# Altium PCB Lab11.PcbDoc
Units mil, origin at the board's own origin, x right, y up, seen from the top; angles counter-clockwise.
Board outline 6200 x 5500 mil, 2 copper layers (Top Layer, Top, Bottom Layer, Bottom); 21 components, 15 nets, 48 pads, 0 vias.
Unrouted connection lines stored in the file: 2.
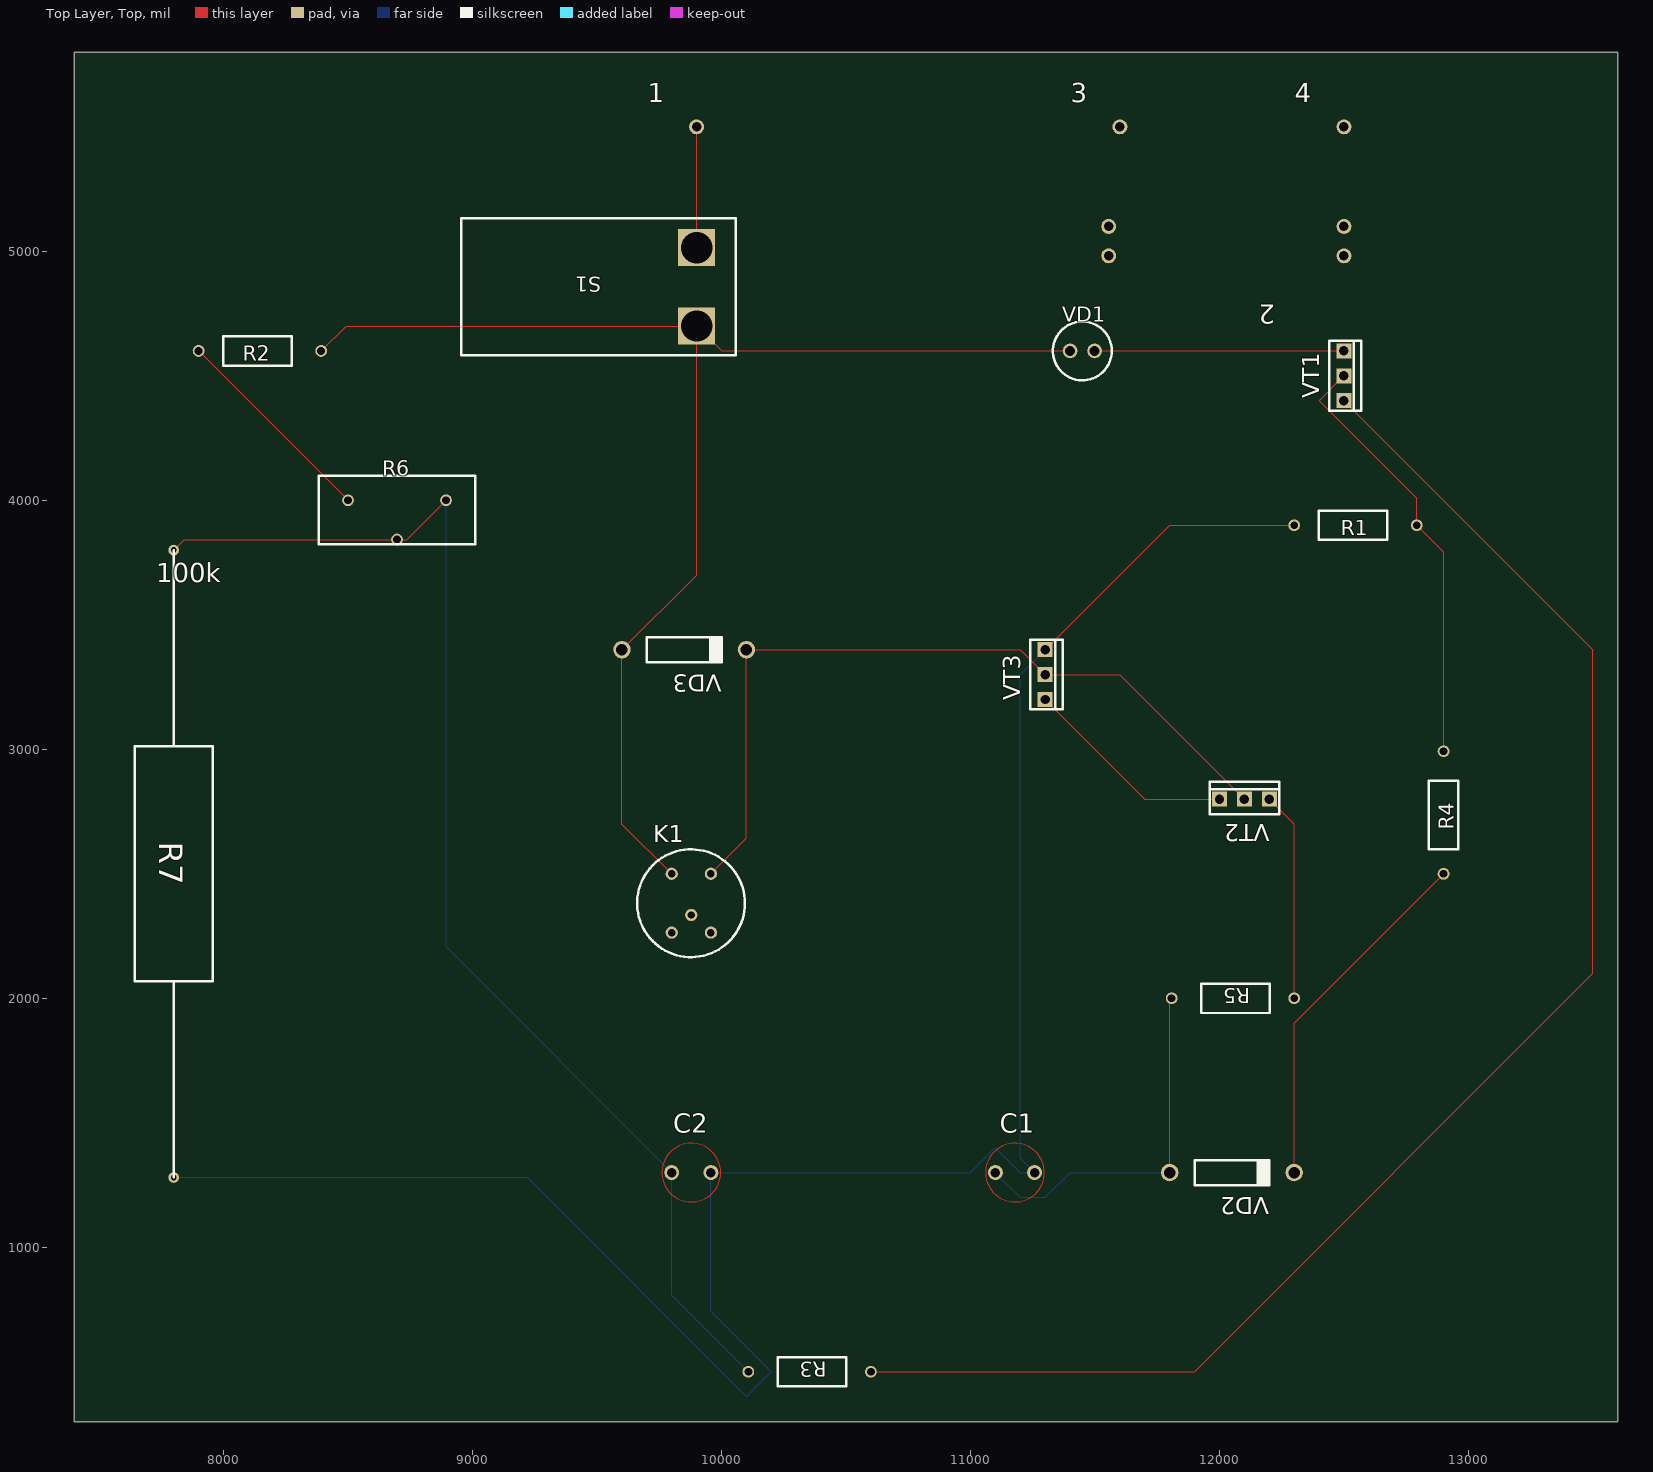
[diagram p0: Top Layer, Top view]
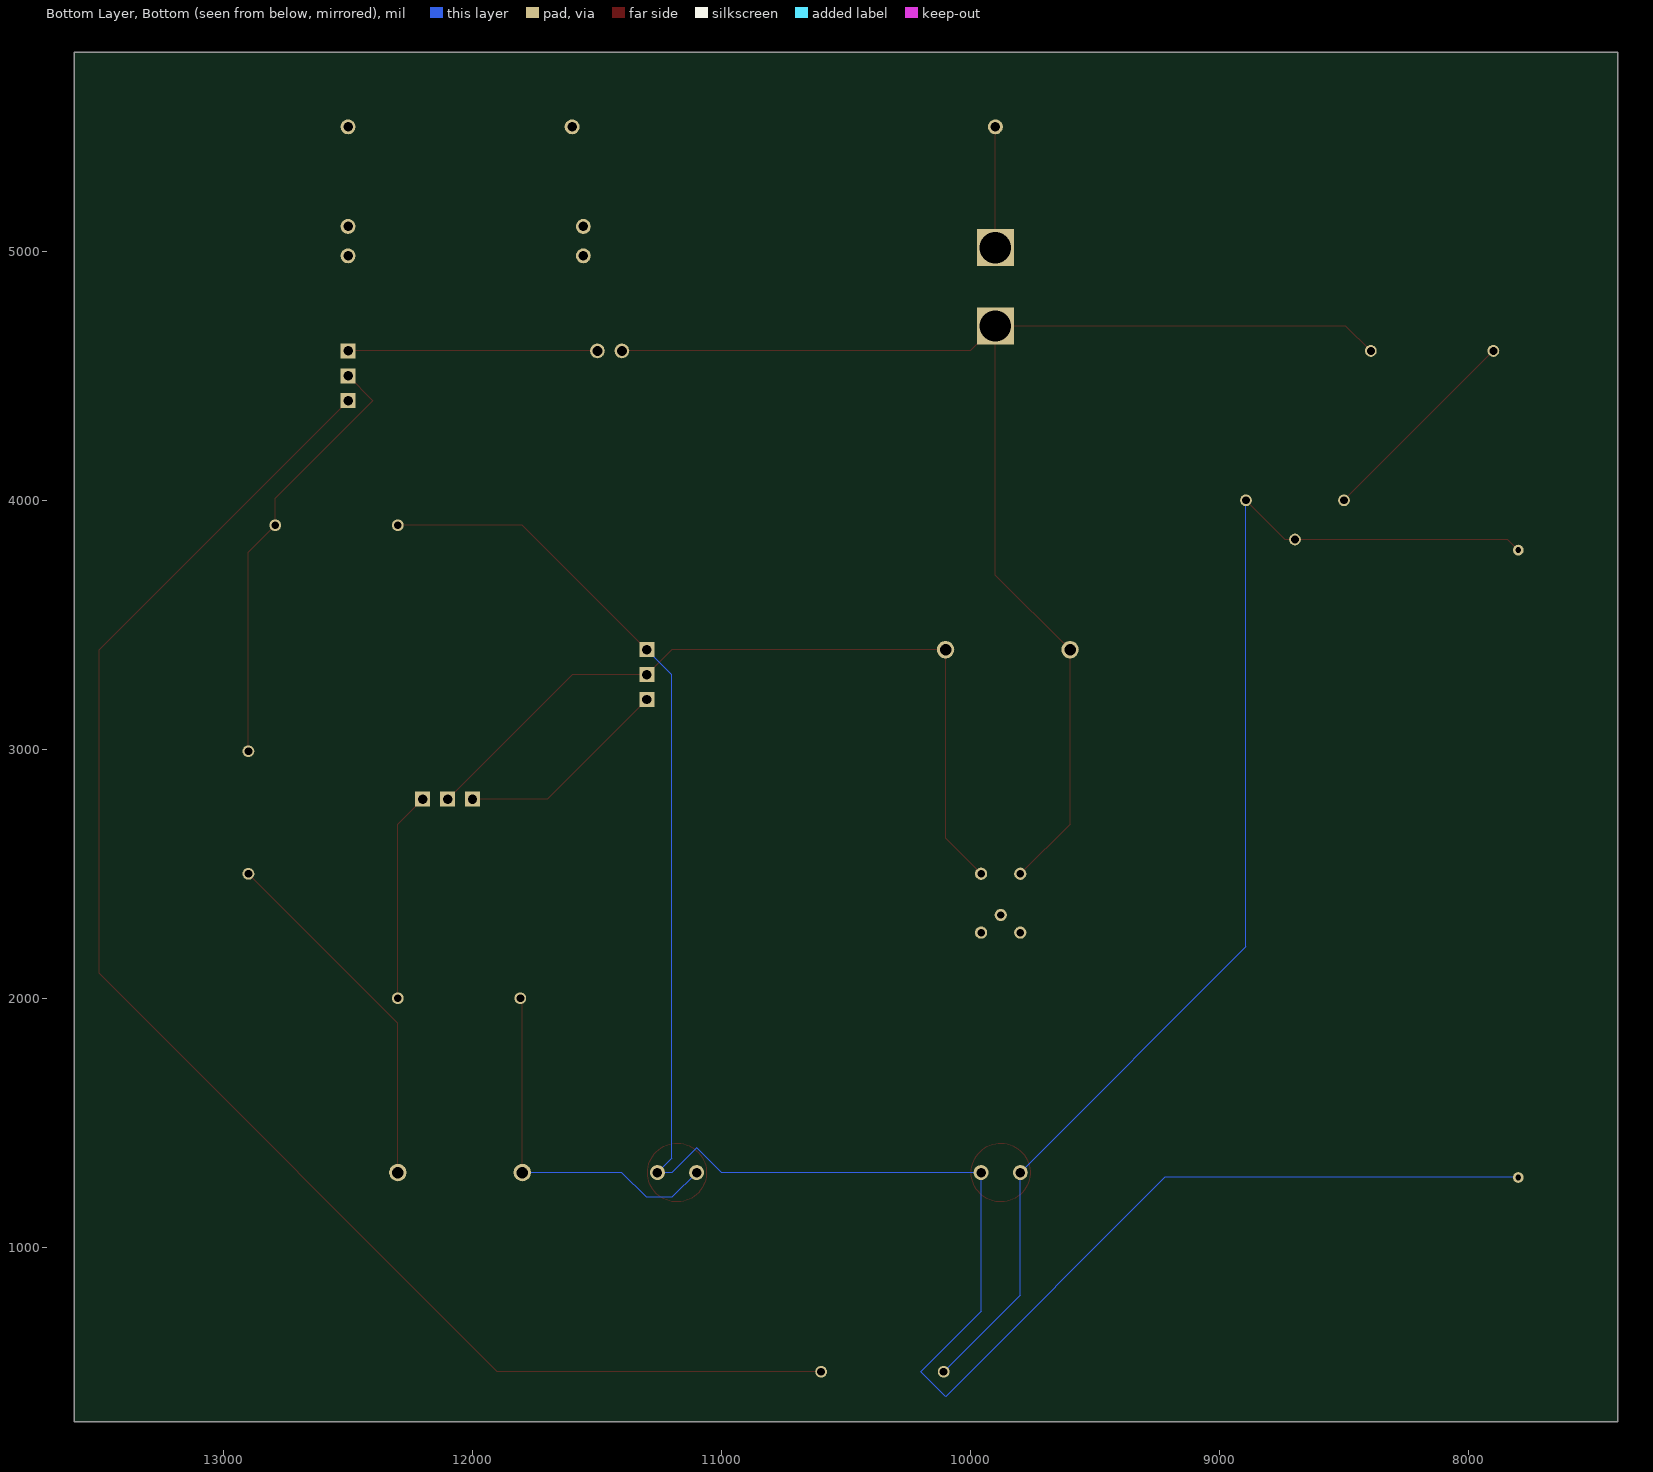
[diagram p1: Bottom Layer, Bottom view, seen from below]

## Layer stack, top to bottom
Top Solder, Top Mask: solder mask 0.4, Solder Resist, Dk 3.5
Top Layer, Top: signal copper 1.4
Dielectric 1: dielectric 12.6, FR-4, Dk 4.8
Bottom Layer, Bottom: signal copper 1.4
Bottom Solder, Bot Mask: solder mask 0.4, Solder Resist, Dk 3.5

## Board outline
7400,300 13600,300 13600,5800 7400,5800

## Design rules (kind name [scope] priority, off if disabled: settings)
Clearance [All] p1: gap=10 ignorepadtopadclearanceinfootprint=FALSE except(0: Arc-Hole Track-Hole SMDPad-Hole THPad-Hole Via-Hole Fill-Hole Poly-Hole Region-Hole Text-Hole; 11.81: Arc-Arc Arc-Track Arc-THPad Arc-Via Track-Track Track-THPad Track-Via THPad-THPad THPad-Via Via-Via)
PlaneClearance [All] p1: clearance=10
PolygonConnect [All] p1: connectstyle=Relief reliefconductorwidth=10 reliefentries=4 polygonreliefangle="90 Angle" airgapwidth=10
RoomDefinition [All] p1: confinementstyle=ConfineIn formatcopy=TRUE lockcomponents=FALSE outline 7400,300 13600,300 13600,5800 7400,5800
RoutingVias [All] p1: holewidth=28 width=50 viastyle="Through Hole" minholewidth=28 minwidth=50 maxholewidth=28 maxwidth=50
SolderMaskExpansion [All] p1: expansion=4 istentingtop=FALSE
Width [All] p1: maxlimit=10 minlimit=10 preferedwidth=10
29 further rules are at their usual default settings.

## Components (designator, comment, footprint, x,y, rotation, side; value= is the part's Value field where it differs from the comment)
1 "+U=9...12V" XP_1 9900,5500 r0 top
2 "" K1.1_K1.1(Primary) 12500,5100 r180 top
3 "" XP_1 11600,5500 r0 top
4 "" XP_1 12500,5500 r0 top
C1 "50mk 16V" CAP2 11100,1300 r0 top
C2 "0.01mk" CAP2 9800,1300 r0 top
K1 "{Value}" RES15 9800,2500 r0 top
R1 "470" МЛТ(0.25) 12300,3900 r0 top
R2 "1k" МЛТ(0.25) 7900,4600 r0 top
R3 "1k" МЛТ(0.25) 10600,500 r180 top
R4 "1k" МЛТ(0.25) 12900,2500 r90 top
R5 "0.75" МЛТ(0.25) 12300,2000 r180 top
R6 "47k" СП3-38В 8500,4000 r0 top
R7 "100k" MMT-4 7800,3800 r270 top
S1 "{Value}" Т1 9900,4700 r180 top
VD1 "{Value}" АЛ307 11400,4600 r0 top
VD2 "{Value}" DO-7 12300,1300 r180 top
VD3 "{Value}" DO-7 10100,3400 r180 top
VT1 "{Value}" КТ315 12500,4400 r90 top
VT2 "{Value}" КТ315 12200,2800 r180 top
VT3 "{Value}" КТ315 11300,3200 r90 top

## Footprints (in the part's own frame and the unit in brackets; to place one, negate y for a bottom-side part, rotate by r counter-clockwise, add the part's x,y. Pads: shape width x height; smd on the part's side, far side on the other; paste and mask are expansions set on the pad)
CAP2 [mil]
  round 60 hole 38: 1(0,0) 2(157.48,0)
  Top Layer, Top circle w3.94: c78.74,0 r118.11
DO-7 [mil]
  round 70 hole 46: 1(500,0) 2(0,0)
  silkscreen extent 100,-50 400,50
K1.1_K1.1(Primary) [mil]
  round 60 hole 38: 3(0,0) 4(0,118.11) 4(944.88,118.11) 5(944.88,0)
MMT-4 [mm]
  round 1.1 hole 0.6: 1(0,0) 2(64,0)
  silkscreen extent 0,-4 64,4
RES15 [mm]
  round 1.25 hole 0.75: 1(0,0) 2(4,0) 3(0,-6) 4(4,-6) 5(2,-4.2)
  silkscreen extent -3.53,-8.5 7.47,2.5
XP_1 [mil]
  round 60 hole 38: 1(0,0)
АЛ307 [mm]
  round 1.5 hole 1: 1(0,0) 2(2.5,0)
  silkscreen extent -1.75,-3 4.25,3
КТ315 [mil]
  rect 60x60 hole 38: 1(0,0) 2(100,0) 3(200,0)
  silkscreen extent -40,-70 240,60
МЛТ(0.25) [mm]
  round 1.2 hole 0.8: 1(0,0) 2(12.5,0)
  silkscreen extent 2.5,-1.5 9.5,1.5
СП3-38В [mm]
  round 1.2 hole 0.8: 1(0,0) 2(10,0) 3(5,-4)
  silkscreen extent -3,-4.5 13,2.5
Т1 [mm]
  rect 3.8x3.8 hole 3.2: 1(0,0) 2(0,-8)
  silkscreen extent -4,-11 24,3

## Nets (pads, with @x,y where several pads share a name; then routed paths per layer and width w, separated by ;. In a path a pad name is that pad's centre, name@x,y a point inside that pad or via, vN(x,y) a via of type N, cw(c..) or ccw(c..) an arc to the next point about the centre after c; other vN are vias at no path point)
1: C1.2 C2.2 R1.1 R7.2 VT3.3 | length 8461.7
  Top Layer, Top w3.94: VT3.3 11800,3900 R1.1
  Bottom Layer, Bottom w3.94: R7.2 9219.68,1280.32 10100,400 10200,500 9957.48,742.52 C2.2 11000,1300 11100,1400 11200,1300 C1.2 11200,1357.48 11200,3300 VT3.3
NET00000: R1.2 R4.2 VT1.2 | length 1756.4
  Top Layer, Top w3.94: VT1.2 12400,4400 12792.13,4007.87 R1.2 12900,3792.13 R4.2
NET00001: R3.1 VT1.1 | length 6277
  Top Layer, Top w3.94: R3.1 11900,500 13500,2100 13500,3400 VT1.1
NET00002: VD1.2 VT1.3 | length 1001.6
  Top Layer, Top w3.94: VD1.2 VT1.3
NET00003: R4.1 VD2.2 | length 1448.5
  Top Layer, Top w3.94: VD2.2 12300,1900 R4.1
NET00004: C1.1 R5.2 VD2.1 | length 1486.1
  Top Layer, Top w3.94: VD2.1 11800,1992.13 R5.2
  Bottom Layer, Bottom w3.94: C1.1 11200,1200 11300,1200 11400,1300 VD2.1
NET00007: 2.5 3.1
NET00008: 2.3 4.1
NET00009: C2.1 R3.2 R6.2 R6.3 R7.1 | length 5179.5
  Top Layer, Top w3.94: R7.1 7842.52,3842.52 R6.3 8736.22,3842.52 R6.2
  Bottom Layer, Bottom w3.94: R6.2 8893.7,2206.3 C2.1 9800,807.87 R3.2
NET00010: R2.1 R6.1 | length 848.5
  Top Layer, Top w3.94: R2.1 R6.1
NET00012: K1.2 VD3.2 VT2.2 VT3.2 | length 3207.6
  Top Layer, Top w3.94: K1.2 10100,2642.52 VD3.2 11200,3400 VT3.2 11600,3300 VT2.2
NET00013: 1.1 S1.2 | length 485
  Top Layer, Top w3.94: S1.2 1.1
NET00014: R5.1 VT2.1 | length 841.4
  Top Layer, Top w3.94: VT2.1 12300,2700 R5.1
NET00015: VT2.3 VT3.1 | length 865.7
  Top Layer, Top w3.94: VT3.1 11700,2800 VT2.3
NET00016: K1.1 R2.2 S1.1 VD1.1 VD3.1 | length 5497.8
  Top Layer, Top w3.94: R2.2 8492.13,4700 S1.1 ; K1.1 9600,2700 VD3.1 9900,3700 S1.1 ; VD1.1 10000,4600 S1.1
pads on no net: 2.4 K1.3 K1.4 K1.5